# Altium PCB PCB_T3.PcbDoc
Units mm, origin at the board's own origin, x right, y up, seen from the top; angles counter-clockwise.
Board outline 80 x 60 mm, 2 copper layers (Top Layer, Bottom Layer); 10 components, 13 nets, 57 pads, 0 vias.
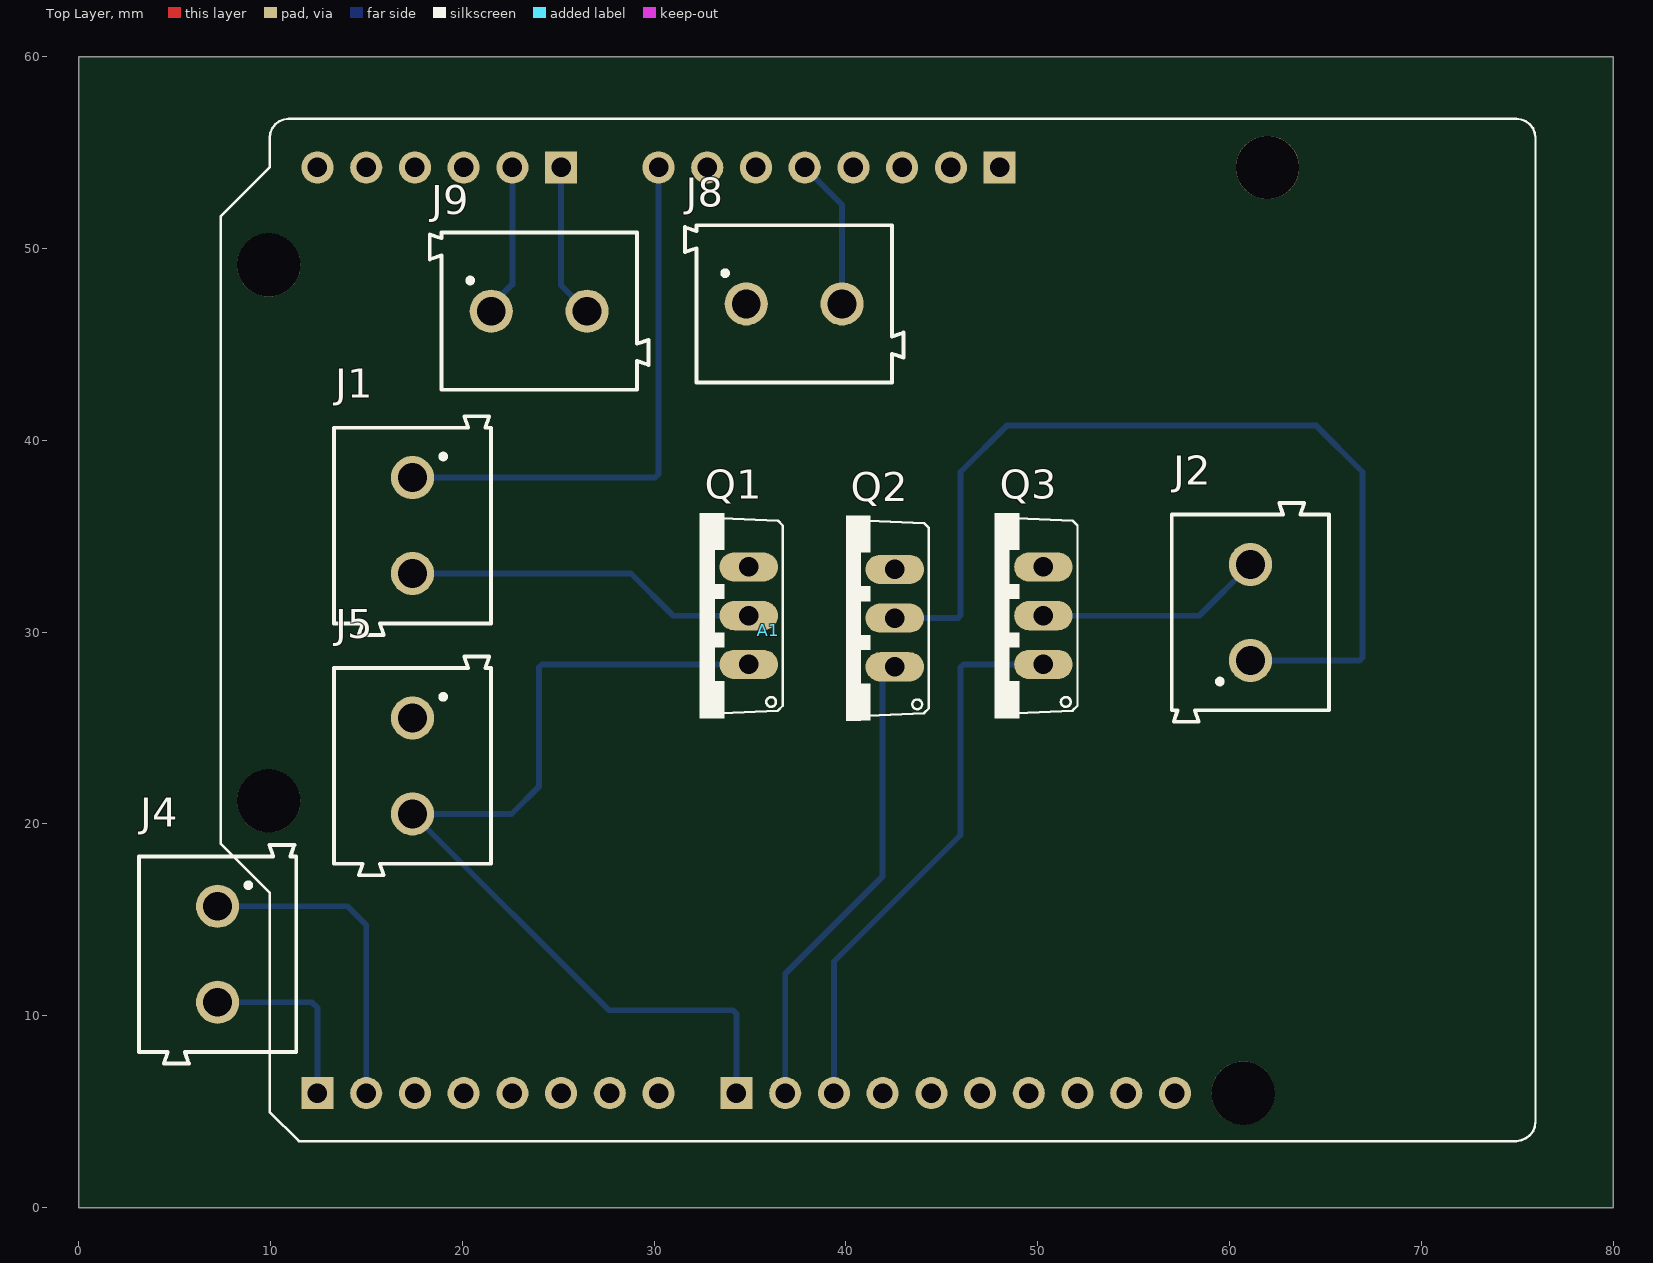
[diagram p0: Top Layer view]
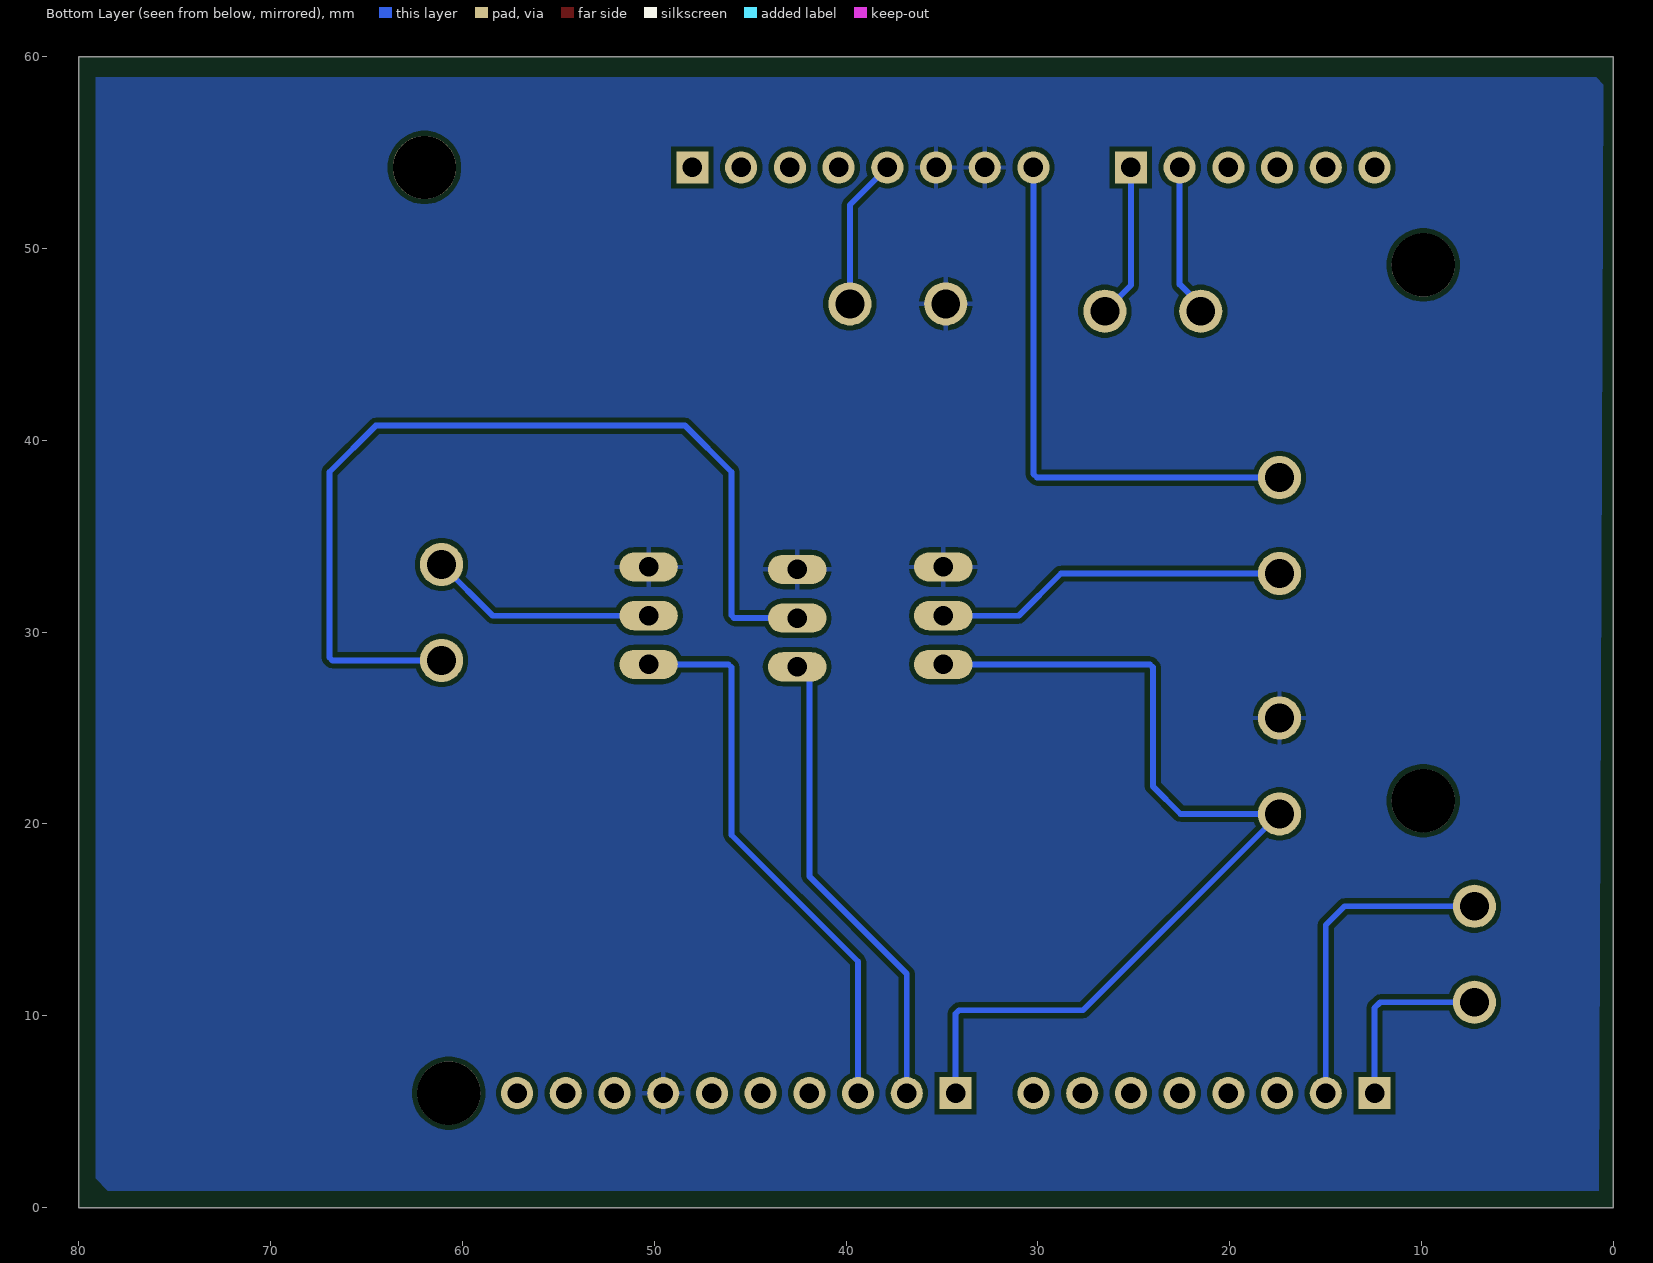
[diagram p1: Bottom Layer view, seen from below]

## Layer stack, top to bottom
Top Solder: solder mask 0.0102, Solder Resist, Dk 3.5
Top Layer: signal copper 0.0356
Dielectric 1: dielectric 0.32, FR-4, Dk 4.8
Bottom Layer: signal copper 0.0356
Bottom Solder: solder mask 0.0102, Solder Resist, Dk 3.5

## Board outline
0,0 0,60 80,60 80,0

## Design rules (kind name [scope] priority, off if disabled: settings)
Clearance [All] p1: gap=0.254 ignorepadtopadclearanceinfootprint=FALSE except(0: Arc-Hole Track-Hole SMDPad-Hole THPad-Hole Via-Hole Fill-Hole Poly-Hole Region-Hole Text-Hole; 0.305: Arc-Arc Arc-Track Arc-SMDPad Arc-THPad Track-Track Track-SMDPad Track-THPad SMDPad-SMDPad SMDPad-THPad THPad-THPad)
PolygonConnect [All] p1: connectstyle=Relief reliefconductorwidth=0.254 reliefentries=4 polygonreliefangle="90 Angle" airgapwidth=0.254
RoutingVias [All] p1: holewidth=0.711 width=1.27 viastyle="Through Hole" minholewidth=0.711 minwidth=1.27 maxholewidth=0.711 maxwidth=1.27
SolderMaskExpansion [All] p1: expansion=0.102 istentingtop=FALSE
Width [All] p1: maxlimit=2.54 minlimit=0.254 preferedwidth=0.305 minimp=50.000000 maximp=50.000000 favimp=50.000000
30 further rules are at their usual default settings.

## Components (designator, comment, footprint, x,y, rotation, side; value= is the part's Value field where it differs from the comment)
A1 "A000066" ARDUINO_A000066 75.946,56.769 r180 top locked
J1 "691111710002" 691111710002 17.399,35.56 r270 top
J2 "691111710002" 691111710002 61.087,31.028 r90 top
J4 "691111710002" 691111710002 7.239,13.208 r270 top
J5 "691111710002" 691111710002 17.399,23.027 r270 top
J8 "691111710002" 691111710002 37.298,47.117 r0 top
J9 "691111710002" 691111710002 24.003,46.736 r0 top
Q1 "FQP30N06L" TO220V 32.385,30.861 r90 top
Q2 "FQP30N06L" TO220V 40.005,30.734 r90 top
Q3 "FQP30N06L" TO220V 47.752,30.861 r90 top

## Footprints (in the part's own frame and the unit in brackets; to place one, negate y for a bottom-side part, rotate by r counter-clockwise, add the part's x,y. Pads: shape width x height; smd on the part's side, far side on the other; paste and mask are expansions set on the pad)
691111710002 [mm]
  round 2.25 hole 1.5: 1(-2.5,0) 2(2.5,0)
  silkscreen extent -5.7,-4.1 5.7,4.1
ARDUINO_A000066 [mil]
  round 66 hole 40: 3V3(1400,100) 5V(1500,100) A1(2100,100) A2(2200,100) A3(2300,100) A4(2400,100) A4(SDA)(840,2000) A5(2500,100) A5(SCL)(740,2000) AREF(940,2000) D1(2400,2000) D2(2300,2000) D3(2200,2000) D4(2100,2000) D5(2000,2000) D6(1900,2000) D7(1800,2000) D9(1540,2000) D10(1440,2000) D11(1340,2000) D12(1240,2000) D13(1140,2000) GND_1(1700,100) GND_2(1600,100) GND_3(1040,2000) IOREF(1200,100) RST(1300,100) VIN(1800,100)
  rect 66x66 / inner round 66 / far side rect 66x66 hole 40: A0(2000,100) D0(2500,2000) D8(1640,2000) P1(1100,100)
  round 129.92 hole 129.92 unplated: ""(550,100) ""(600,2000) ""(2600,300) ""(2600,1400)
  silkscreen extent 0,0 2698,2098, body extent -1606,-1050 1350,1050, height 467
TO220V [mil]
  oval 60x120 hole 40: 1(-100,-100) 2(0,-100) 3(100,-100)
  silkscreen extent -210,-170 210,0

## Part data
A1: "Microcontroller board based on the ATmega328P.", Package="Non-Standard Arduino", Availability="Not in stock", Check_prices=https://www.snapeda.com/parts/Arduino%20Uno%20Rev3/Arduino/view-part/?ref=eda, MF=Arduino, MP="Arduino Uno Rev3", Price=None, SnapEDA_Link=https://www.snapeda.com/parts/Arduino%20Uno%20Rev3/Arduino/view-part/?ref=snap
J1 J2 J4 J5 J8 J9: "2 Position Wire to Board Terminal Block Horizontal with Board 0.197 (5.00mm) Through Hole", Package=None, Check_prices=https://www.snapeda.com/parts/691111710002/Wurth+Electronics+Inc./view-part/?ref=eda, MF="Wurth Electronics", MP=691111710002, SnapEDA_Link=https://www.snapeda.com/parts/691111710002/Wurth+Electronics+Inc./view-part/?ref=snap
Q1 Q2 Q3: "N-Channel 60V 32A _Tc_ 79W _Tc_ Through Hole TO-220-3", Package="TO-220 ON Semiconductor", Availability=Unavailable, MF="ON Semiconductor", MP=FQP30N06L, Price=None, SnapEDA_Link=https://www.snapeda.com/parts/FQP30N06L/ON%20Semiconductor/view-part/1413126/?ref=snap

## Nets (pads, with @x,y where several pads share a name; then routed paths per layer and width w, separated by ;. In a path a pad name is that pad's centre, name@x,y a point inside that pad or via, vN(x,y) a via of type N, cw(c..) or ccw(c..) an arc to the next point about the centre after c; other vN are vias at no path point)
+12: A1.VIN J1.1 | length 28.9
  Bottom Layer w0.305: J1.1 30.047,38.06 30.226,38.239 A1.VIN
GND: A1.GND_1 A1.GND_2 A1.GND_3 J5.1 J8.1 Q1.3 Q2.3 Q3.3
NetA1_5V: A1.5V J8.2 | length 7.9
  Bottom Layer w0.305: A1.5V 39.798,52.277 J8.2
NetA1_A0: A1.A0 J9.2 | length 8.1
  Bottom Layer w0.305: A1.A0 25.146,48.093 J9.2
NetA1_A1: A1.A1 J9.1 | length 7.9
  Bottom Layer w0.305: J9.1 21.503,47.03 22.606,48.133 A1.A1
NetA1_D0: A1.D0 J4.2 | length 9.8
  Bottom Layer w0.305: J4.2 12.152,10.708 12.446,10.414 A1.D0
NetA1_D1: A1.D1 J4.1 | length 16.9
  Bottom Layer w0.305: J4.1 14.01,15.708 14.986,14.732 A1.D1
NetA1_D8: A1.D8 J5.2 Q1.1 | length 49.7
  Bottom Layer w0.305: A1.D8 34.29,10.108 34.111,10.287 27.639,10.287 J5.2 22.559,20.527 24.003,21.971 24.003,28.172 24.152,28.321 Q1.1
NetA1_D9: A1.D9 Q2.1 | length 24.6
  Bottom Layer w0.305: A1.D9 36.83,12.192 41.91,17.272 41.91,27.607 42.497,28.194 Q2.1
NetA1_D10: A1.D10 Q3.1 | length 29.3
  Bottom Layer w0.305: A1.D10 39.37,12.827 45.974,19.431 45.974,28.172 46.123,28.321 Q3.1
NetJ1_2: J1.2 Q1.2 | length 18.4
  Bottom Layer w0.305: J1.2 28.789,33.06 30.988,30.861 Q1.2
NetJ2_1: J2.1 Q2.2 | length 49.5
  Bottom Layer w0.305: Q2.2 45.825,30.734 45.974,30.883 45.974,38.354 48.387,40.767 64.516,40.767 66.929,38.354 66.929,28.677 66.78,28.528 J2.1
NetJ2_2: J2.2 Q3.2 | length 11.9
  Bottom Layer w0.305: Q3.2 58.42,30.861 J2.2
pads on no net: A1. A1.3V3 A1.A2 A1.A3 A1.A4 A1.A4(SDA) A1.A5 A1.A5(SCL) A1.AREF A1.D2 A1.D3 A1.D4 A1.D5 A1.D6 A1.D7 A1.D11 A1.D12 A1.D13 A1.IOREF A1.P1 A1.RST

## Polygon pours and split planes (outlines as drawn)
GND on Bottom Layer "GND_L02_P000" (solid, pour order 0): 0.762,0.889 78.486,0.889 79.121,1.524 79.121,58.928 0.889,58.928 0.508,58.547

## Text inside footprints (layer, text, board x,y; h text height)
Q1: Mechanical 13 "1" at 35.566,27.68 h1.27 r90; Mechanical 13 "2" at 35.564,30.225 h1.27 r90; Mechanical 13 "3" at 35.563,32.768 h1.27 r90
Q2: Mechanical 13 "1" at 43.186,27.553 h1.27 r90; Mechanical 13 "2" at 43.184,30.098 h1.27 r90; Mechanical 13 "3" at 43.183,32.641 h1.27 r90
Q3: Mechanical 13 "1" at 50.933,27.68 h1.27 r90; Mechanical 13 "2" at 50.931,30.225 h1.27 r90; Mechanical 13 "3" at 50.93,32.768 h1.27 r90